# EAGLE board driver_piezo (EAGLE 7.1.0)
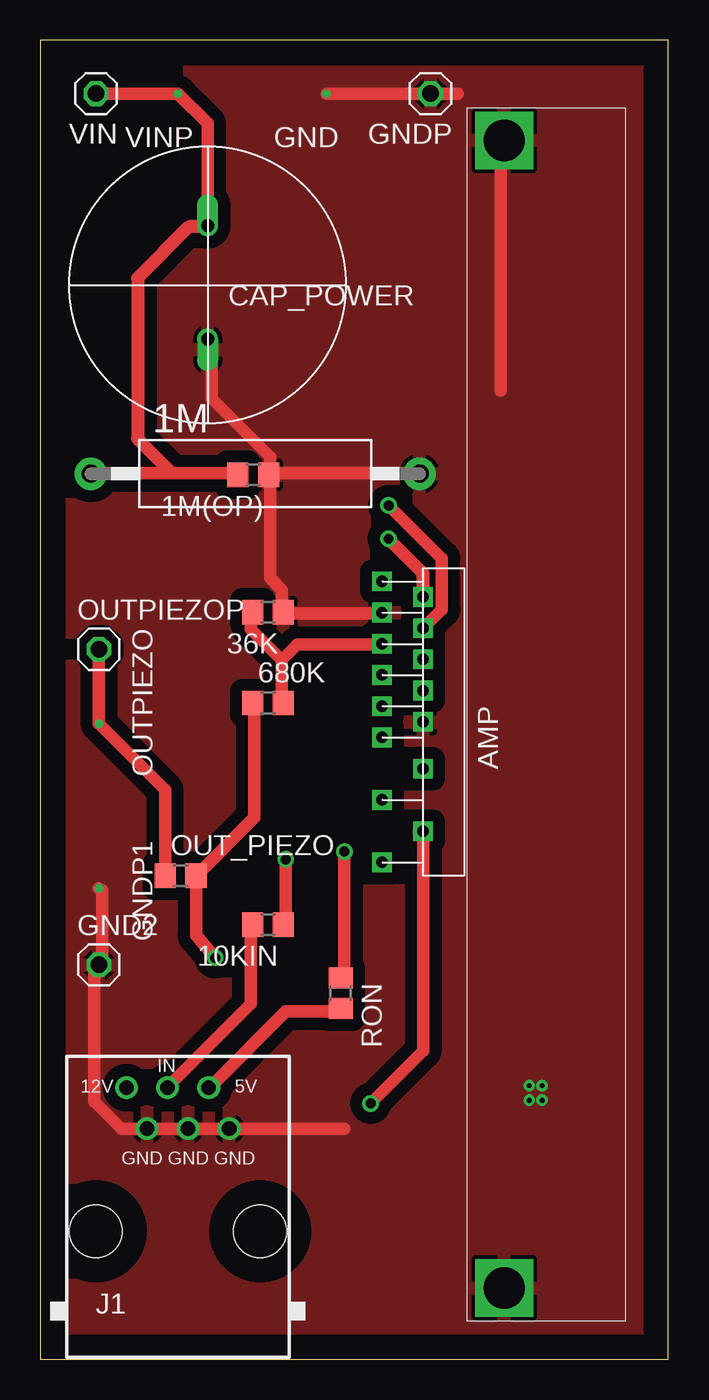
[diagram p0: board, top side]
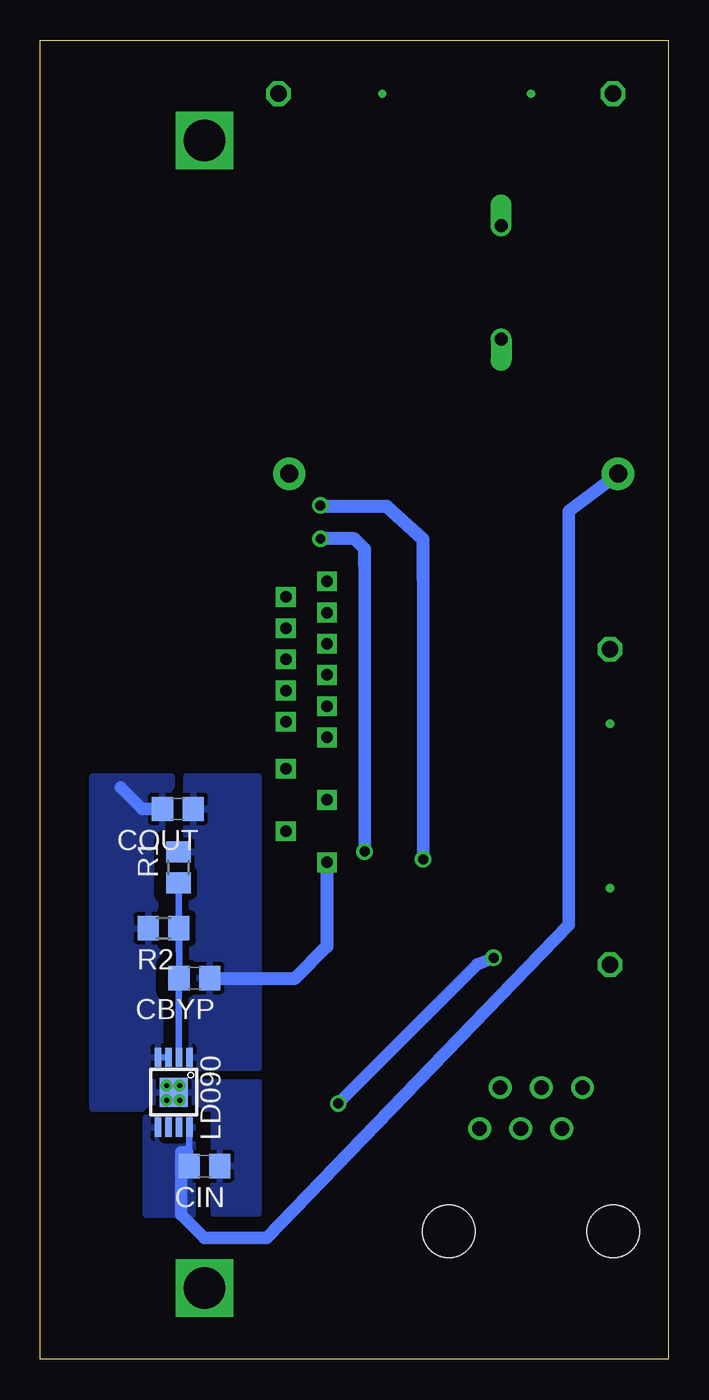
[diagram p1: board, bottom side, seen from below]

Size 38.8 x 81.5 mm. Coordinates in mm from the lower left corner, seen from the top.
Outline: 0,0 38.8,0 38.8,81.5 0,81.5 0,0
Copper layers (1*16): Top 0.035mm / dielectric 1.5mm / Bottom 0.035mm
Design rules "default *": minimum track width 30mil, minimum drill 24mil, track to track 8mil, track to pad 8mil, pad to pad 8mil, via to via 8mil, smd to smd 8mil, copper to edge 60mil, drill to drill 8mil, minimum pad ring 10mil, minimum via ring 8mil, stop-mask expansion 4mil, vias tented up to drill 0mil, thermal gap 10mil
Net classes: 1 PWR: width 0.127 mm, clearance 0.406 mm; 2 GND: width 0.127 mm, clearance 0.762 mm; 3 VIN: width 0.127 mm, clearance 0.406 mm; 4 5V: width 0.406 mm, clearance 0.61 mm

## Footprints (pad centres in the part's own frame; a part is rotated, then mirrored left to right if it is on the bottom)
CA0002 = drill 1.1 pad 2: 1 -10.16,0; 2 10.16,0
R0805 = smd 1.3 x 1.5: 1 -0.95,0; 2 0.95,0
POWER_AMP_LME49811TB = drill 0.71 square: -VEE -1.351,-0.455; COMP -1.351,3.405; GND -3.891,6.3; IN+ -1.351,5.335; IN- -3.891,4.37; NC -1.351,-3.35; NC1 -3.891,-1.42; NC2 -3.891,0.51; NC3 -1.351,1.475; NC4 -3.891,2.44; NC5 -3.891,8.23; SD -1.351,7.265; SINK -3.891,-5.28; SOURCE -1.351,-7.21; VCC -3.891,-9.14
CAP200V = drill 0.8 offset: + 0,3.65; - 0,-3.35
C0805 = smd 1.3 x 1.5: 1 -0.95,0; 2 0.95,0
PAD = drill 0.003: P$1 0,0
1X01 = drill 1.016 octagon: 1 0,0
RJ12-STRAIGHT-ANALOG = drill 0.9 pad 1.4: +5V 1.905,8.89; +12V -3.175,8.89; GND1 3.175,6.35; GND2 0.635,6.35; GND3 -1.905,6.35; IN -0.635,8.89 | hole 3.251: -5.08,0; 5.08,0
S-PDSO-G08 = smd 0.4 x 1.2: 1 -0.975,-2.157; 2 -0.325,-2.157; 3 0.325,-2.157; 4 0.975,-2.157; 5 0.975,2.157; 6 0.325,2.157; 7 -0.325,2.157; 8 -0.975,2.157 | smd 1.73 x 1.78: TH 0,0
DISIPADOR = drill 2.55 square: P$1 -3.22,-34.98; P$2 -3.22,35.95

## Placement (x,y rotation side)
1M  [CA0002]  13.27,54.72 0 top
1M(OP)  [R0805]  13.15,54.65 180 top
10KIN  [R0805]  14.06,26.85 180 top
36K  [R0805]  14.06,46.15 180 top
680K  [R0805]  14.06,40.55 0 top
AMP  POWER_AMP_LME49811TB  [POWER_AMP_LME49811TB]  24.99,39.84 0 top
CAP_POWER  CAP200VCAP200V  [CAP200V]  10.33,66.39 0 top
CBYP  [C0805]  29.29,23.55 180 bottom
CIN  [C0805]  28.66,11.93 180 bottom
COUT  [C0805]  30.31,34 180 bottom
GND  PAD  [PAD]  17.68,78.21 0 top
GND2  [1X01]  3.61,24.37 0 top
GNDP  [1X01]  24.1,78.21 180 top
GNDP1  PAD  [PAD]  3.61,29.1 90 top
J1  RJ12STRAIGHT-ANALOG  [RJ12-STRAIGHT-ANALOG]  8.49,7.89 0 top
LD090  TPS7A4001  [S-PDSO-G08]  30.57,16.49 180 bottom
OUT_PIEZO  [R0805]  8.66,29.87 0 top
OUTPIEZO  PAD  [PAD]  3.61,39.27 90 top
OUTPIEZOP  [1X01]  3.61,43.87 0 top
R1  [R0805]  30.27,30.38 90 bottom
R2  [R0805]  31.2,26.63 180 bottom
RON  [R0805]  18.55,22.61 270 top
U$1  DISIPADOR  [DISIPADOR]  31.88,39.37 0 top
VIN  [1X01]  3.43,78.21 180 top
VINP  PAD  [PAD]  8.49,78.21 0 top

## Library data of the parts
1M = resistor-power; OC_FARNELL: unknown; OC_NEWARK: unknown
1M(OP) 10KIN 36K 680K CBYP CIN COUT OUT_PIEZO R1 R2 RON = sym
AMP CAP_POWER GND GNDP1 LD090 OUTPIEZO U$1 VINP = PIEZO_LBR
GND2 GNDP OUTPIEZOP VIN = pinhead
J1 = lpatiny

## Nets
5V [5V]: J1.+5V RON.2
B: 36K.2 680K.2 AMP.IN-
FB: CBYP.2 LD090.2 R1.1 R2.1
GND [GND]: 1M(OP).1 1M.2 36K.1 AMP.-VEE AMP.GND CAP_POWER.- CIN.1 COUT.2 GND2.1 GND.P$1 GNDP1.P$1 GNDP.1 J1.GND1 J1.GND2 J1.GND3 LD090.3 LD090.4 LD090.TH R2.2 U$1.P$1 U$1.P$2
IN_AMP: 10KIN.1 AMP.IN+
IN_VOLTAGE: 10KIN.2 J1.IN
ON: AMP.SD RON.1
OUT_PIEZO: OUT_PIEZO.1 OUTPIEZO.P$1 OUTPIEZOP.1
SOURCE: 680K.1 AMP.SOURCE OUT_PIEZO.2
V90 [PWR]: AMP.VCC CBYP.1 COUT.1 LD090.1 R1.2
VIN [VIN]: 1M(OP).2 1M.1 CAP_POWER.+ CIN.2 LD090.5 LD090.8 VIN.1 VINP.P$1

## Tracks (layer width: path | path; a pad name or v marks a point on that pad's centre or on a via)
5V
  Top 0.762: RON.2 18.53,21.48 15.15,21.48 10.57,16.89 J1.+5V
B
  Top 0.762: 14.91,43.19 14.91,40.78 680K.2 | 14.91,43.19 12.98,45.12 12.98,46.09 36K.2 | 14.91,43.19 15.88,44.16 20.95,44.16 AMP.IN-
FB
  Bottom 0.406: LD090.2 30.24,22.15 CBYP.2 30.24,25.23 R2.1 30.27,25.23 R1.1
GND  (via drill 0.3)
  Top 0.762: AMP.GND 20.95,46.09 15.15,46.09 36K.1 14.91,46.33 14.91,47.54 14.19,48.26 14.19,54.53 1M(OP).1 | CAP_POWER.- 10.57,62.98 10.57,59.36 14.19,55.74 14.19,55.02 1M(OP).1 | 1M(OP).1 14.73,54.77 23.66,54.77 1M.2 23.6,55.02 | 28.43,59.84 28.43,75.29 U$1.P$2 | GNDP1.P$1 3.81,28.96 3.81,24.37 GND2.1 3.33,24.13 3.33,15.93 5.02,14.24 6.23,14.24 J1.GND3 6.71,14.24 J1.GND2 9.36,14.24 11.54,14.24 J1.GND1 12.02,14.24 18.77,14.24 | GND.P$1 GNDP.1 25.77,78.21
  Bottom 0.406: LD090.3 LD090.4
  Bottom 0.762: 23.84,39.33 AMP.-VEE | 33.83,35.33 32.5,34 COUT.2
  other vias: 30.2,16.9 31,16.9 31,16 30.2,16
  pour Bottom: 30.7,18 30.7,36 35.6,36 35.6,18
  pour Bottom: 35.6,18 35.6,15.5 28.1,15.5 28.1,9 25.3,9 25.3,17.1 32.2,17.1 32.2,18
  pour Top: 1.4,79.8 1.4,0 37.4,0 37.4,80 1.4,80
IN_AMP  (via drill 0.61)
  Top 0.762: v15.15,30.89 15.15,27.03 10KIN.1 | v21.51,52.76 24.81,49.47 24.81,46.33 23.84,45.36 AMP.IN+
  Bottom 0.762: 15.15,48.21 v15.15,30.89
  Bottom 0.813: 15.15,48.21 15.15,50.65 17.4,52.7 21.15,52.7 v21.51,52.76
IN_VOLTAGE
  Top 0.762: 10KIN.2 12.98,26.78 12.98,21.96 7.91,16.89 J1.IN
ON  (via drill 0.61)
  Top 0.762: v18.77,31.37 18.77,23.65 RON.1
  Top 0.813: AMP.SD 23.64,48.56 v21.5,50.7
  Bottom 0.762: 18.77,49.07 v18.77,31.37
  Bottom 0.813: 18.77,49.07 18.77,50.07 19.4,50.7 v21.5,50.7
OUT_PIEZO
  Top 0.762: OUT_PIEZO.1 7.71,35.17 OUTPIEZO.P$1 OUTPIEZOP.1
SOURCE  (via drill 0.61)
  Top 0.762: v20.4,15.8 23.64,19.04 AMP.SOURCE 23.36,32.58 | 680K.1 13.22,40.54 13.22,33.48 OUT_PIEZO.2 9.62,29.88 9.62,26.18 v10.8,24.8
  Bottom 0.762: v10.8,24.8 11.8,24.4 v20.4,15.8
V90
  Bottom 0.813: AMP.VCC 21.1,25.5 23.1,23.5 28.29,23.5 CBYP.1
  pour Bottom: 29.8,18 29.8,36 25.3,36 25.3,18
VIN
  Top 0.762: 1M(OP).2 12.02,54.77 8.1,54.77 3.33,54.77 1M.1 | 10.33,69.98 CAP_POWER.+ 10.33,76.37 VINP.P$1 VIN.1
  Top 0.813: 10.33,69.98 9.18,69.98 6,66.8 6,56.9 6.1,56.8 6.1,56.77 8.1,54.77
  Bottom 0.406: CIN.2 29.59,12.23 LD090.8
  Bottom 0.762: 29.73,12.79 30.11,12.79 30.11,8.93 28.67,7.48 24.81,7.48 6.16,26.83 6.16,52.4 3.33,54.53 1M.1
  pour Bottom: 29.4,14.9 29.4,8.9 32.3,8.9 32.3,14.9